# EAGLE board ShiftIn-small (EAGLE 9.6.2)
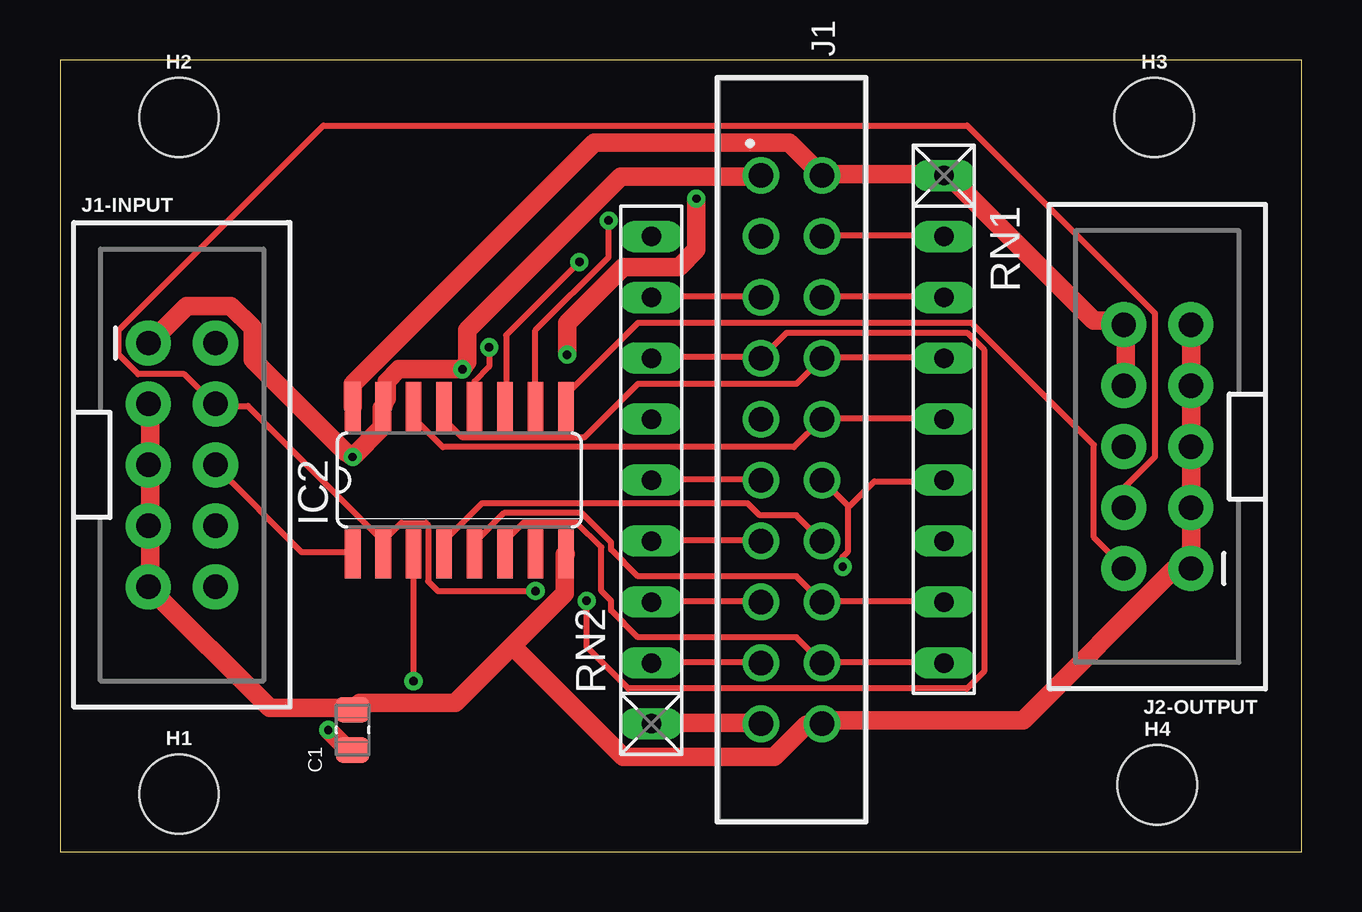
[diagram p0: board, top side]
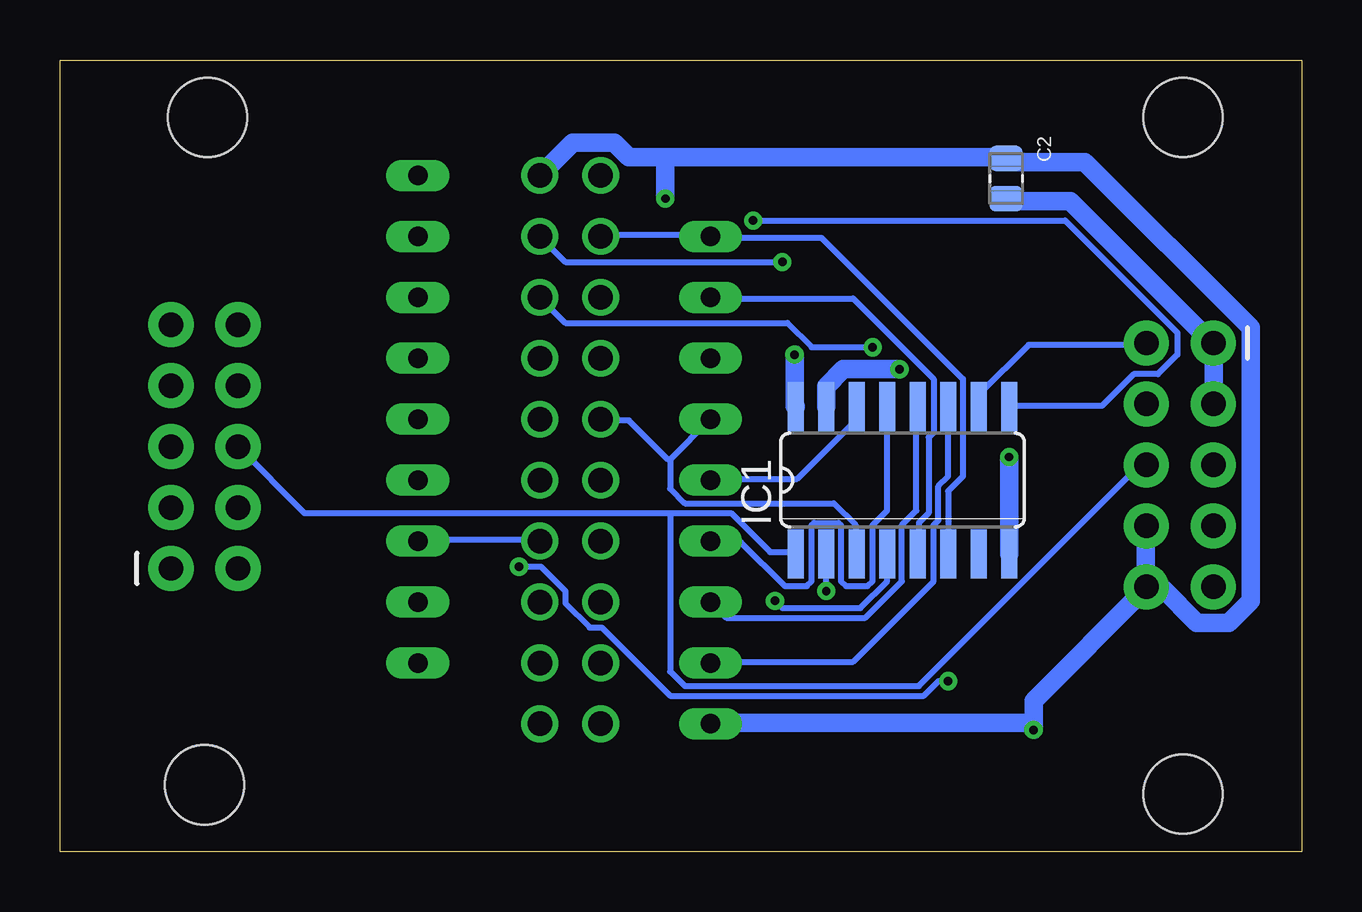
[diagram p1: board, bottom side, seen from below]

Size 51.74 x 33.01 mm. Coordinates in mm from the lower left corner, seen from the top.
Outline: 0,0 51.74,0 51.74,33.01 0,33.01 0,0
Copper layers (1*16): Top 0.035mm / dielectric 1.5mm / Bottom 0.035mm
Design rules "default": minimum track width 6mil, minimum drill 0.35mm, track to track 6mil, track to pad 6mil, pad to pad 6mil, via to via 6mil, smd to smd 6mil, copper to edge 40mil, drill to drill 6mil, minimum pad ring 10mil, minimum via ring 8mil, stop-mask expansion 4mil, vias tented up to drill 0mil, thermal gap 10mil
Net classes: 0 default: width 0.254 mm; 1 power: width 0.762 mm

## Footprints (pad centres in the part's own frame; a part is rotated, then mirrored left to right if it is on the bottom)
CAP_0805 = smd 1.05 x 1.38: 1 -0.84,0; 2 0.84,0
STAND-OFF = hole 3.302: 0,0
SO16 = smd 0.66 x 2.032: 1 -4.445,-3.073; 2 -3.175,-3.073; 3 -1.905,-3.073; 4 -0.635,-3.073; 5 0.635,-3.073; 6 1.905,-3.073; 7 3.175,-3.073; 8 4.445,-3.073; 9 4.445,3.073; 10 3.175,3.073; 11 1.905,3.073; 12 0.635,3.073; 13 -0.635,3.073; 14 -1.905,3.073; 15 -3.175,3.073; 16 -4.445,3.073
61202022323 = drill 1.02: 1 -11.43,-1.27; 2 -11.43,1.27; 3 -8.89,-1.27; 4 -8.89,1.27; 5 -6.35,-1.27; 6 -6.35,1.27; 7 -3.81,-1.27; 8 -3.81,1.27; 9 -1.27,-1.27; 10 -1.27,1.27; 11 1.27,-1.27; 12 1.27,1.27; 13 3.81,-1.27; 14 3.81,1.27; 15 6.35,-1.27; 16 6.35,1.27; 17 8.89,-1.27; 18 8.89,1.27; 19 11.43,-1.27; 20 11.43,1.27
2X5-SHROUDED_LOCK = drill 1.016 pad 1.88: 1 -1.397,5.08; 2 1.397,5.08; 3 -1.397,2.54; 4 1.397,2.54; 5 -1.397,0; 6 1.397,0; 7 -1.397,-2.54; 8 1.397,-2.54; 9 -1.397,-5.08; 10 1.397,-5.08
RN-9 = drill 0.813 long: 1 -10.16,0; 2 -7.62,0; 3 -5.08,0; 4 -2.54,0; 5 0,0; 6 2.54,0; 7 5.08,0; 8 7.62,0; 9 10.16,0

## Placement (x,y rotation side)
C1  CC0805KRX7R9BB104  [CAP_0805]  12.19,5.08 90 top
C2  CC0805KRX7R9BB104  [CAP_0805]  12.32,28.07 270 bottom
H1  STAND-OFF  [STAND-OFF]  4.95,2.41 0 top
H2  STAND-OFF  [STAND-OFF]  4.95,30.61 0 top
H3  STAND-OFF  [STAND-OFF]  45.59,30.61 0 top
H4  STAND-OFF  [STAND-OFF]  45.72,2.79 0 top
IC1  74HC165D  [SO16]  16.64,15.49 0 bottom
IC2  74HC165D  [SO16]  16.64,15.49 0 top
J1  61202022323  [61202022323]  30.48,16.76 270 top
J1-INPUT  [2X5-SHROUDED_LOCK]  5.08,16.13 0 top
J2-OUTPUT  [2X5-SHROUDED_LOCK]  45.72,16.89 180 top
RN1  10k  [RN-9]  36.83,18.03 270 top
RN2  10k  [RN-9]  24.64,15.49 90 top

## Library data of the parts
C1 C2 = Resistor_Capacitor; CREATED_BY: PCBLayout.com; DIGIKEY_PART_NUMBER: 311-1140-2-ND; MANUFACTURER: Yageo; MPN: CC0805KRX7R9BB104; PACKAGE: SMD 0805
H1-H4 = SparkFun-Hardware
IC1 IC2 = 74xx-eu
J1 = Wurth_Connectors_WR-BHD; CONTACT-RESISTANCE: 20mOhm; DATASHEET-URL: https://www.we-online.com/catalog/datasheet/61202022323.pdf; GENDER: Transition; IR: 1A; L: 30.85mm; MOUNT: THT; PACKAGING: Tray; PART-NUMBER: 61202022323; PINS: 20; PITCH: 2.54mm; TYPE: Straight; WORKING-VOLTAGE: 250V(AC)
J1-INPUT J2-OUTPUT = SparkFun-Connectors; PROD_ID: CONN-08671; SF_ID: PRT-08506
RN1 RN2 = resistor-net; OC_FARNELL: unknown; OC_NEWARK: unknown

## Nets
GND [power]: C1.2 C2.2 IC1.8 IC1.15 IC2.8 IC2.15 J1-INPUT.1 J1-INPUT.3 J1-INPUT.5 J1-INPUT.7 J1-INPUT.9 J1.1 J1.20 J2-OUTPUT.1 J2-OUTPUT.3 J2-OUTPUT.5 J2-OUTPUT.7 J2-OUTPUT.9
N$1: IC1.2 IC2.2 J1-INPUT.4 J2-OUTPUT.4
N$2: IC1.9 IC2.10
N$3: IC1.10 J1-INPUT.2
N$4: IC1.11 J1.17 RN2.2
N$6: IC2.9 J2-OUTPUT.2
N$7: IC1.12 J1.15 RN2.3
N$8: IC1.13 J1.13 RN2.4
N$9: IC1.14 J1.11 RN2.5
N$10: IC1.3 J1.9 RN2.6
N$11: IC1.4 J1.7 RN2.7
N$12: IC1.5 J1.5 RN2.8
N$13: IC1.6 J1.3 RN2.9
N$14: IC2.11 J1.4 RN1.2
N$15: IC2.12 J1.6 RN1.3
N$16: IC2.13 J1.8 RN1.4
N$17: IC2.14 J1.10 RN1.5
N$18: IC2.3 J1.12 RN1.6
N$19: IC2.4 J1.14 RN1.7
N$20: IC2.5 J1.16 RN1.8
N$21: IC2.6 J1.18 RN1.9
N$22: IC1.1 IC2.1 J1-INPUT.6 J2-OUTPUT.6
VCC [power]: C1.1 C2.1 IC1.16 IC2.16 J1-INPUT.8 J1-INPUT.10 J1.2 J1.19 J2-OUTPUT.8 J2-OUTPUT.10 RN1.1 RN2.1

## Tracks (layer width: path | path; a pad name or v marks a point on that pad's centre or on a via)
GND  (via drill 0.35)
  Top 0.762: J1.1 29.16,28.14 23.37,28.14 16.97,21.74 16.97,20.42 v16.76,20.12 14.12,20.12 13.61,19.61 13.61,18.9 IC2.15 13.41,18.49 13.41,17.68 v12.19,16.46 11.89,16.66 8.03,20.52 8.03,21.84 7.11,22.76 5.28,22.76 3.76,21.23 J1-INPUT.1 | J2-OUTPUT.9 47.14,21.95 47.14,19.71 J2-OUTPUT.7 47.14,19.41 47.14,17.17 J2-OUTPUT.5 47.14,16.87 47.14,14.63 J2-OUTPUT.3 47.14,14.33 47.14,11.89 J2-OUTPUT.1 46.74,11.79 46.43,11.79 40.13,5.49 32.11,5.49 J1.20 31.7,5.28 31.09,5.28 29.77,3.96 23.47,3.96 18.85,8.59 | 18.85,8.59 16.46,6.2 12.5,6.2 C1.2 12.19,5.99 8.74,5.99 J1-INPUT.9 3.76,11.38 3.76,13.51 J1-INPUT.7 3.76,13.92 3.76,16.05 J1-INPUT.5 3.76,16.46 3.76,18.59 J1-INPUT.3 | 18.85,8.59 21.03,10.77 21.03,12.39 IC2.8
  Bottom 0.762: v12.19,16.46 IC1.8 | IC1.15 19.81,19.41 19.1,20.12 v16.76,20.12 | C2.2 12.29,27.13 9.65,27.13 3.76,21.23 J1-INPUT.1 3.66,20.83 3.66,18.69 J1-INPUT.3
N$1  (via drill 0.35)
  Top 0.254: v19.81,10.87 15.75,10.87 15.34,11.28 15.34,13.61 15.24,13.72 14.22,13.72 13.51,13.01 IC2.2 13.41,12.5 13.41,13.01 7.82,18.59 6.5,18.59 J1-INPUT.4 6.4,18.69 5.18,19.91 3.25,19.91 2.44,20.73 2.44,21.74 10.97,30.28 37.8,30.28 45.62,22.45 45.62,16.46 44.4,15.24 44.4,14.43 J2-OUTPUT.4
  Bottom 0.254: v19.81,10.87 IC1.2
N$2  (via drill 0.35)
  Top 0.254: v22.86,26.31 22.86,24.79 19.81,21.74 IC2.10
  Bottom 0.254: v22.86,26.31 9.86,26.31 5.18,21.64 5.18,20.73 5.99,19.91 7.01,19.91 8.33,18.59 12.19,18.59 IC1.9
N$3
  Bottom 0.254: IC1.10 13.41,18.59 13.41,19.1 11.38,21.13 6.5,21.13 J1-INPUT.2
N$4
  Top 0.254: J1.17 29.16,7.92 24.69,7.92 RN2.2
  Bottom 0.254: IC1.11 14.73,15.65 15.14,15.24 15.14,13.82 15.34,13.61 15.34,11.28 18.69,7.92 24.59,7.92 RN2.2
N$6
  Top 0.254: IC2.9 21.13,18.59 21.13,19.1 24.08,22.05 38,22.05 43.08,16.97 43.08,13.11 44.3,11.89 J2-OUTPUT.2
N$7
  Top 0.254: J1.15 29.16,10.46 24.69,10.46 RN2.3
  Bottom 0.254: RN2.3 23.98,9.75 18.19,9.75 16.66,11.28 16.66,13.61 16.05,14.22 16.05,18.49 IC1.12
N$8
  Top 0.254: J1.13 29.16,13.01 24.69,13.01 RN2.4
  Bottom 0.254: IC1.13 17.27,14.22 17.88,13.61 17.88,11.28 18.09,11.07 19,11.07 19.2,11.28 19.2,13.61 19.3,13.72 20.32,13.72 20.42,13.61 20.42,11.28 20.62,11.07 21.54,11.07 23.37,12.9 24.59,12.9 RN2.4
N$9
  Top 0.254: J1.11 29.16,15.54 24.69,15.54 RN2.5
  Bottom 0.254: IC1.14 18.59,18.49 18.59,17.98 21.03,15.54 24.59,15.54 RN2.5
N$10
  Bottom 0.254: 26.31,16.36 26.31,15.14 25.7,14.53 19.51,14.53 18.59,13.61 18.59,12.5 IC1.3 | RN2.6 26.31,16.36 | J1.9 29.16,17.98 28.04,17.98 26.42,16.36 26.31,16.36
N$11  (via drill 0.35)
  Top 0.254: v21.95,10.46 21.95,8.53 23.67,6.81 37.8,6.81 38.51,7.52 38.51,20.93 37.8,21.64 30.28,21.64 J1.7 29.16,20.62 24.69,20.62 RN2.7
  Bottom 0.254: IC1.4 17.27,11.28 18.39,10.16 21.64,10.16 v21.95,10.46
N$12
  Top 0.254: J1.5 29.16,23.16 24.69,23.16 RN2.8
  Bottom 0.254: IC1.5 15.95,12.5 15.95,13.72 15.54,14.12 15.54,17.27 15.34,17.48 15.34,19.71 18.69,23.06 24.59,23.06 RN2.8
N$13
  Bottom 0.254: IC1.6 14.73,15.04 14.12,15.65 14.12,19.71 20.02,25.6 24.59,25.6 RN2.9 24.69,25.7 29.16,25.7 J1.3
N$14  (via drill 0.35)
  Top 0.254: v21.64,24.59 18.59,21.54 18.59,18.59 IC2.11 | RN1.2 36.78,25.7 31.8,25.7 J1.4
  Bottom 0.254: v21.64,24.59 30.68,24.59 J1.4
N$15  (via drill 0.35)
  Top 0.254: IC2.12 17.27,19.61 17.88,20.22 v17.88,21.03 | RN1.3 36.78,23.16 31.8,23.16 J1.6
  Bottom 0.254: v17.88,21.03 20.42,21.03 21.44,22.05 30.68,22.05 J1.6
N$16
  Top 0.254: IC2.13 16.05,18.49 16.05,17.98 16.76,17.27 21.84,17.27 24.08,19.51 30.68,19.51 J1.8 31.8,20.62 36.78,20.62 RN1.4
N$17
  Top 0.254: IC2.14 14.73,18.09 15.95,16.87 30.58,16.87 J1.10 31.8,18.09 36.78,18.09 RN1.5
N$18  (via drill 0.35)
  Top 0.254: v14.73,7.11 IC2.3 | v32.61,11.89 32.61,12.29 32.82,12.5 32.82,14.43 | J1.12 32.82,14.43 | RN1.6 36.78,15.44 33.93,15.44 32.92,14.43 32.82,14.43
  Bottom 0.254: v14.73,7.11 15.14,7.11 15.75,6.5 26.31,6.5 29.16,9.35 29.67,9.35 30.68,10.36 30.68,10.87 31.7,11.89 v32.61,11.89
N$19
  Top 0.254: J1.14 30.68,14.02 29.16,14.02 28.65,14.53 17.58,14.53 16.05,13.01 16.05,12.5 IC2.4
  Bottom 0.254: RN1.7 36.78,13.01 31.8,13.01 J1.14
N$20
  Top 0.254: IC2.5 17.27,12.9 18.49,14.12 21.74,14.12 22.96,12.9 22.96,12.6 24.08,11.48 30.68,11.48 J1.16 31.8,10.46 36.78,10.46 RN1.8
N$21
  Top 0.254: IC2.6 18.59,12.5 18.59,13.01 19.3,13.72 21.54,13.72 22.55,12.7 22.55,10.87 22.96,10.46 22.96,10.06 24.08,8.94 30.68,8.94 J1.18 31.8,7.92 36.78,7.92 RN1.9
N$22
  Top 0.254: IC2.1 12.19,12.5 10.06,12.5 6.5,16.05 J1-INPUT.6
  Bottom 0.254: 26.31,14.12 41.55,14.12 J2-OUTPUT.6 | 26.31,14.12 23.77,14.12 22.15,12.5 21.13,12.5 IC1.1 | 26.31,14.12 26.31,7.52 25.7,6.91 15.95,6.91 6.81,16.05 6.5,16.05 J1-INPUT.6
VCC  (via drill 0.35)
  Top 0.762: RN2.1 24.69,5.38 29.16,5.38 J1.19 | v11.18,5.08 11.99,4.27 12.19,4.27 C1.1 | J2-OUTPUT.8 44.4,19.51 44.4,21.95 J2-OUTPUT.10 43.99,22.15 43.08,22.15 37.19,28.04 RN1.1 36.78,28.25 32.11,28.25 J1.2 30.38,29.57 22.25,29.57 12.19,19.51 IC2.16 | v21.13,20.73 21.13,22.05 23.47,24.38 25.81,24.38 26.52,25.09 v26.52,27.23
  Bottom 0.762: 11.18,5.38 11.18,6.3 6.5,10.97 J1-INPUT.10 | 11.18,5.38 v11.18,5.08 | J1-INPUT.8 6.5,13.51 6.5,11.38 J1-INPUT.10 | 11.18,5.38 24.59,5.38 RN2.1 | 26.52,28.96 28.04,28.96 28.65,29.57 30.38,29.57 J1.2 | 26.52,28.96 12.39,28.96 C2.1 11.99,28.75 9.04,28.75 2.13,21.84 2.13,10.46 3.05,9.55 4.37,9.55 5.79,10.97 6.1,10.97 J1-INPUT.10 | v21.13,20.73 21.13,18.59 IC1.16 | 26.52,28.96 v26.52,27.23